# Altium PCB djb_v2_jig_a.PcbDoc
Units mm, origin at the board's own origin, x right, y up, seen from the top; angles counter-clockwise.
Board outline 59 x 33.95 mm, 2 copper layers (Top Layer, Bottom Layer); 18 components, 6 nets, 31 pads, 4 vias.
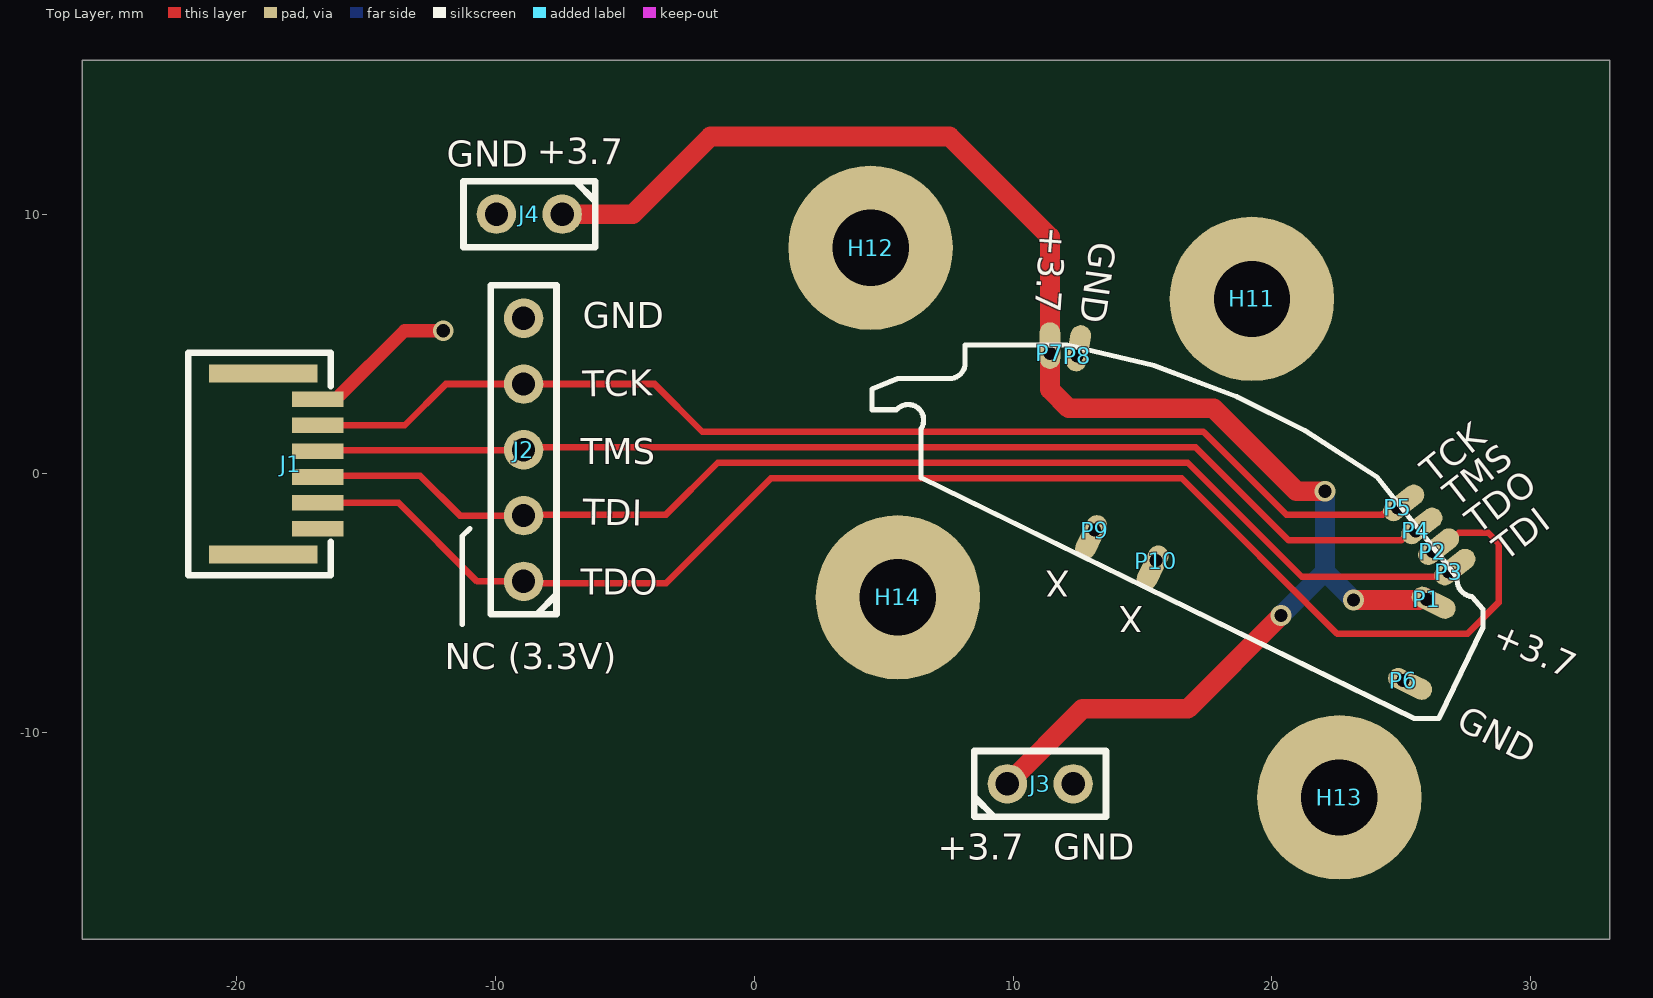
[diagram p0: Top Layer view]
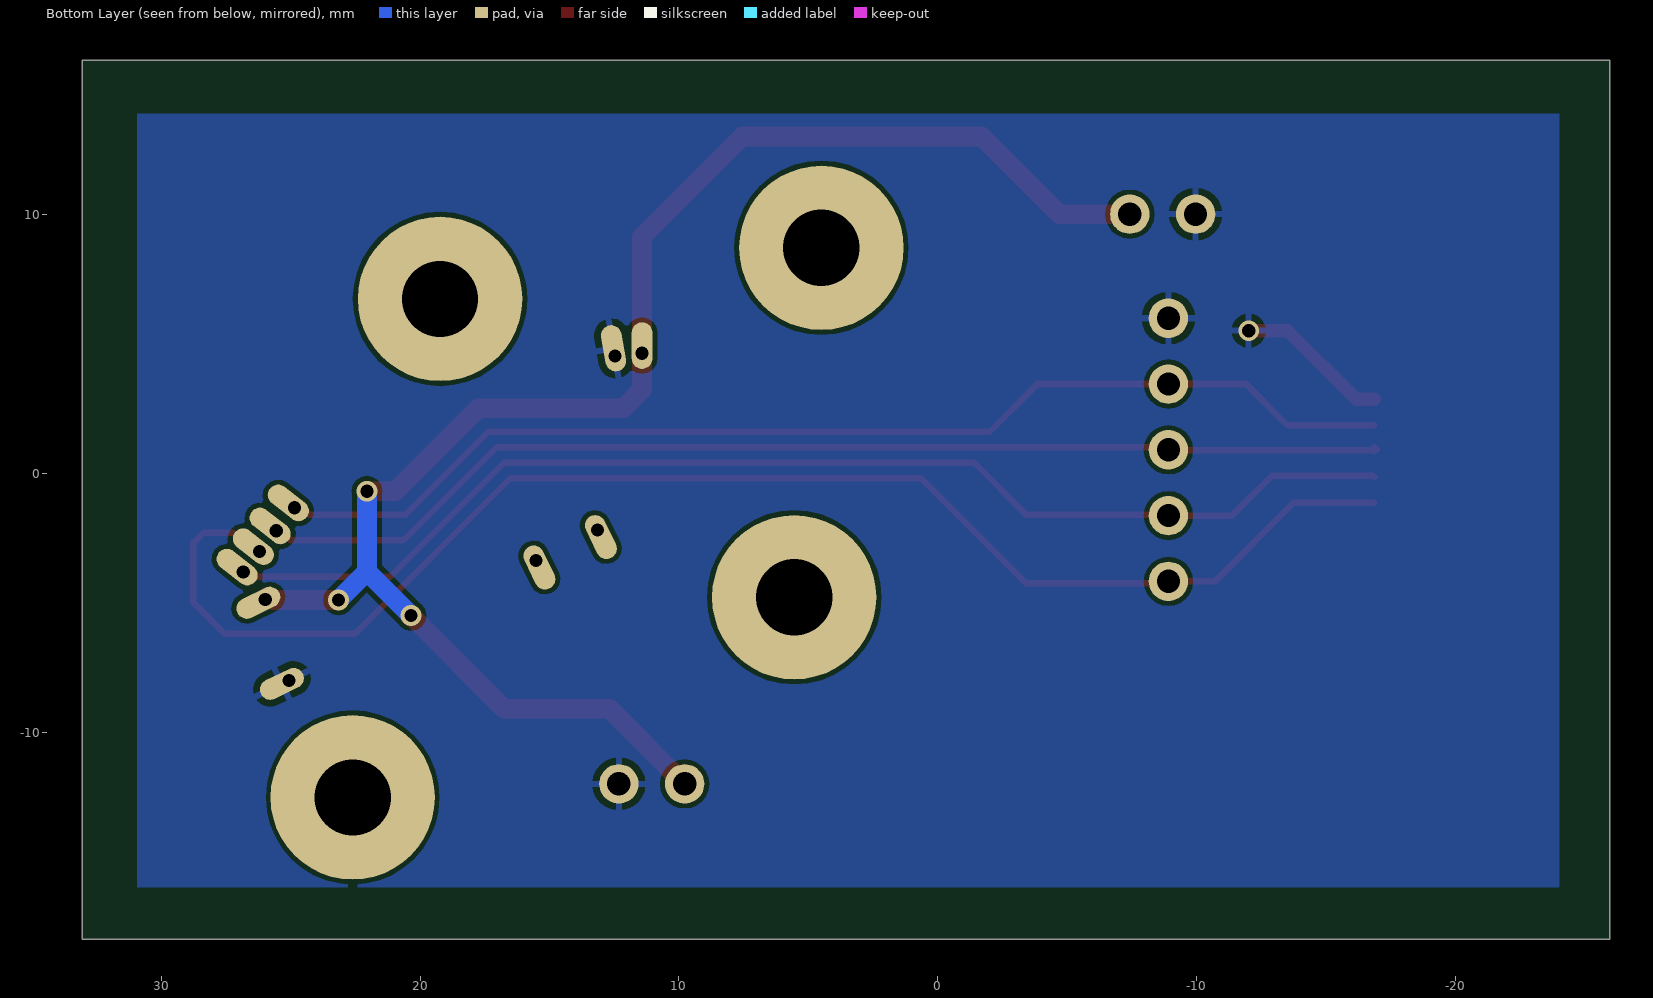
[diagram p1: Bottom Layer view, seen from below]

## Layer stack, top to bottom
Top Solder: solder mask 0.0102, Solder Resist, Dk 3.5
Top Layer: signal copper 0.0356
Dielectric 1: dielectric 0.32, FR-4, Dk 4.8
Bottom Layer: signal copper 0.0356
Bottom Solder: solder mask 0.0102, Solder Resist, Dk 3.5

## Board outline
33.05,-18 33.05,15.95 -25.95,15.95 -25.95,-18

## Design rules (kind name [scope] priority, off if disabled: settings)
Clearance [All] p1: gap=0.178 ignorepadtopadclearanceinfootprint=FALSE
ComponentClearance [All] p1: gap=0.025 collisioncheckmode=3 verticalgap=0.025 showdistances=TRUE
HoleSize [All] p1: absolutevalues=TRUE maxlimit=5.08 minlimit=0.254 maxpercent=80.000 minpercent=20.000
MinimumSolderMaskSliver [All] p1: minsoldermaskwidth=0.127
PolygonConnect [All] p1: connectstyle=Relief reliefconductorwidth=0.254 reliefentries=4 polygonreliefangle="90 Angle" airgapwidth=0.254
RoutingVias [All] p1: holewidth=0.51 width=0.8 viastyle="Through Hole" minholewidth=0.51 minwidth=0.8 maxholewidth=0.51 maxwidth=0.8
SilkToSilkClearance [All] p1: silktosilkclearance=0
SilkToSolderMaskClearance [IsPad] p1: minsilkscreentomaskgap=0 clearancetoexposedcopper=TRUE
SolderMaskExpansion [All] p1: expansion=0.102 istentingtop=FALSE
Width [All] p1: maxlimit=1.27 minlimit=0.254 preferedwidth=0.254 minimp=50.000000 maximp=50.000000 favimp=50.000000
25 further rules are at their usual default settings.

## Components (designator, comment, footprint, x,y, rotation, side; value= is the part's Value field where it differs from the comment)
H11 "4-40 / 0.25\" spacer" SCREW_4-40_1/4-SPACER 19.225,6.725 r180 top
H12 "4-40 / 0.25\" spacer" SCREW_4-40_1/4-SPACER 4.5,8.7 r180 top
H13 "4-40 / 0.25\" spacer" SCREW_4-40_1/4-SPACER 22.6,-12.525 r180 top
H14 "4-40 / 0.25\" spacer" SCREW_4-40_1/4-SPACER 5.55,-4.795 r180 top
J1 "FFC" AMPHENOL_HFW6R-1STE1LF -18.85,0.35 r90 top
J2 "HDR_5" HDR_5 -8.9,0.9 r90 top
J3 "HDR_2" HDR_2 11.05,-12 r0 top
J4 "HDR_2" HDR_2 -8.68,10 r180 top
P1 "SMITHS_S-00-U-1.3-G_TH" SMITHS_S-00-U-1.3-G_TH 25.975,-4.875 r64 top
P2 "SMITHS_S-00-U-1.3-G_TH" SMITHS_S-00-U-1.3-G_TH 26.2,-3.025 r128 top
P3 "SMITHS_S-00-U-1.3-G_TH" SMITHS_S-00-U-1.3-G_TH 26.825,-3.816 r128 top
P4 "SMITHS_S-00-U-1.3-G_TH" SMITHS_S-00-U-1.3-G_TH 25.55,-2.225 r128 top
P5 "SMITHS_S-00-U-1.3-G_TH" SMITHS_S-00-U-1.3-G_TH 24.85,-1.336 r128 top
P6 "SMITHS_S-00-U-1.3-G_TH" SMITHS_S-00-U-1.3-G_TH 25.063,-8.007 r64 top
P7 "SMITHS_S-00-U-1.3-G_TH" SMITHS_S-00-U-1.3-G_TH 11.425,4.625 r180 top
P8 "SMITHS_S-00-U-1.3-G_TH" SMITHS_S-00-U-1.3-G_TH 12.475,4.525 r170 top
P9 "SMITHS_S-00-U-1.3-G_TH" SMITHS_S-00-U-1.3-G_TH 13.15,-2.2 r334 top
P10 "SMITHS_S-00-U-1.3-G_TH" SMITHS_S-00-U-1.3-G_TH 15.524,-3.375 r334 top

## Footprints (in the part's own frame and the unit in brackets; to place one, negate y for a bottom-side part, rotate by r counter-clockwise, add the part's x,y. Pads: shape width x height; smd on the part's side, far side on the other; paste and mask are expansions set on the pad)
AMPHENOL_HFW6R-1STE1LF [mm] "Amphenol HFW6R-1STE1LF 6-pin flat flexible cable connector"
  rect 0.7x4.2 smd: 0(-3.5,0.1) 0(3.5,0.1)
  rect 0.6x2 smd: 1(-2.5,-2) 2(-1.5,-2) 3(-0.5,-2) 4(0.5,-2) 5(1.5,-2) 6(2.5,-2)
  silkscreen extent -4.3,-2.5 4.3,3, body extent -4.3,-2.5 4.3,3, height 1.9
HDR_2 [mil] "2-pin 0.1\" header"
  round 60 hole 35.43: 1(-50,0) 2(50,0)
  silkscreen extent -100,-50 100,50, body extent -100,-50 100,50, height 400
HDR_5 [mil] "5-pin 0.1\" header"
  round 60 hole 35.43: 1(-200,0) 2(-100,0) 3(0,0) 4(100,0) 5(200,0)
  silkscreen extent -250,-50 250,50, body extent -250,-50 250,50, height 400
SCREW_4-40_1/4-SPACER [mil] "Hole for 4-40 screw with 1/4\" spacer"
  round 250 hole 116 paste-39370.1 mask-39370.1: 0(0,0)
  body extent -125,-125 125,125, height 600
SMITHS_S-00-U-1.3-G_TH [mm] "Smiths Interconnect / IDI S-00-U-1.3-G Pogo Pin, Through-Hole Mount"
  oval 0.8x1.8 hole 0.51 copper offset 0,-0.3: 1(0,0)
  body extent -0.35,-0.35 0.34,0.34, height 13.33

## Part data
H11 H12 H13 H14: library part SCREW_4-40_1/4-SPACER
J1: library part AMPHENOL_HFW6R-1STE1LF, "Amphenol HFW6R-1STE1LF 6-pin flat flexible cable connector"
J2: "5-pin 0.1\" header"
J3 J4: "2-pin 0.1\" header"
P1 P2 P3 P4 P5 P6 P7 P8 P9 P10: "Smiths Interconnect / IDI S-00-U-1.3-G Pogo Pin 0.99mm Centers 16.7mm Long 2.8mm Travel, Through Hole Mount"

## Via types
v1: diameter 0.8, hole 0.51, Top Layer to Bottom Layer, tented both sides, 4 vias

## Nets (pads, with @x,y where several pads share a name; then routed paths per layer and width w, separated by ;. In a path a pad name is that pad's centre, name@x,y a point inside that pad or via, vN(x,y) a via of type N, cw(c..) or ccw(c..) an arc to the next point about the centre after c; other vN are vias at no path point)
+3V7: J3.1 J4.1 P1.1 P7.1 | length 63.1
  Top Layer w0.762: J4.1 -4.68,10 -1.68,13 7.55,13 11.425,9.125 P7.1 11.425,3.225 12.15,2.5 17.75,2.5 20.95,-0.7 v1(22.05,-0.7) ; J3.1 12.68,-9.1 16.75,-9.1 v1(20.35,-5.5) ; v1(23.15,-4.9) 25.672,-4.9 25.778,-4.795 25.895,-4.795 P1.1
  Bottom Layer w0.762: v1(20.35,-5.5) 22.05,-3.8 ; v1(22.05,-0.7) 22.05,-3.8 ; v1(23.15,-4.9) 22.05,-3.8
GND: J1.6 J2.5 J3.2 J4.2 P6.1 P8.1 | length 5.9
  Top Layer w0.508: J1.6 -16.15,2.85 -13.5,5.5 v1(-12,5.5)
TCK: J1.5 J2.4 P5.1 | length 44.6
  Top Layer w0.254: J1.5 -13.492,1.85 -11.902,3.44 J2.4 -3.84,3.44 -2,1.6 17.35,1.6 20.55,-1.6 24.271,-1.6 24.307,-1.564 24.622,-1.564 P5.1
TDI: J1.3 J2.2 P3.1 | length 47.1
  Top Layer w0.254: J1.3 -16.8,-0.1 -12.9,-0.1 -11.36,-1.64 J2.2 -8.86,-1.6 -3.4,-1.6 -1.4,0.4 16.75,0.4 21.15,-4 26.641,-4 P3.1
TDO: J1.2 J2.1 P2.1 | length 56.9
  Top Layer w0.254: J1.2 -13.725,-1.15 -10.695,-4.18 J2.1 -8.83,-4.25 -3.4,-4.25 0.65,-0.2 16.514,-0.2 22.514,-6.2 27.55,-6.2 28.75,-5 28.75,-2.7 28.35,-2.3 27.211,-2.3 26.486,-3.025 P2.1
TMS: J1.4 J2.3 P4.1 | length 44.3
  Top Layer w0.254: J1.4@-16.95,0.9 J1.4@-16.85,1 ; J1.4 -16.825,0.875 -8.925,0.875 J2.3 -8.8,1 17.05,1 20.65,-2.6 24.993,-2.6 25.368,-2.225 P4.1
pads on no net: H11.0 H12.0 H13.0 H14.0 J1.0 J1.1 P9.1 P10.1

## Polygon pours and split planes (outlines as drawn)
GND on Bottom Layer "Bottom Layer-GND" (solid, pour order 2): -24,13.875 30.925,13.875 30.925,-16 -24,-16

## Silkscreen, mask and mechanical layers (free items; w line width, h text height)
Top Overlay:
  lines w0.2: -11.266,-5.833 -11.266,-2.433 -10.966,-2.133 ; 5.502,2.449 cw(c5.95,2.05) 6.453,1.723 ; 5.502,2.45 4.55,2.45 4.55,3.25 5.55,3.65 7.55,3.65 ccw(c7.55,4.25) 8.15,4.25 8.15,4.95 12.09,4.95 15.45,4.15 18.65,2.95 21.25,1.65 24.05,-0.15 27.153,-4.047 ccw(c27.803,-4.125) 27.725,-4.775 28.15,-5.25 28.15,-5.95 26.45,-9.475 25.486,-9.477 6.45,-0.18 6.45,1.725
  text "+3.7" at -8.392,11.975 h1 r359
  text "GND" at -11.875,11.825 h1
  text "+3.7" at 11.075,9.55 h1 r266
  text "GND" at 13,8.975 h1 r262
  text "GND" at -6.625,5.6 h1
  text "TCK" at -6.625,2.95 h1 r1
  text "TMS" at -6.7,0.35 h1
  text "TCK" at 26.25,-0.45 h1 r39
  text "TMS" at 27.125,-1.35 h1 r38
  text "TDI" at -6.625,-2 h1 r359
  text "TDO" at 27.95,-2.4 h1 r37
  text "TDI" at 29,-3.45 h1 r37.36
  text "X" at 12.2,-3.775 h1 r180
  text "TDO" at -6.7,-4.688 h1
  text "X" at 15.025,-5.15 h1 r180
  text "+3.7" at 28.425,-6.6 h1 r336
  text "NC (3.3V)" at -11.95,-7.575 h1
  text "GND" at 27.05,-9.825 h1 r333
  text "+3.7" at 7.1,-14.925 h1
  text "GND" at 11.55,-14.925 h1
Mechanical 3:
  lines w0.2: -26,-18 -26,15.95 33,15.95 33,-18 -26,-18